# EAGLE board clock sync v1.0 (EAGLE 6.5.0)
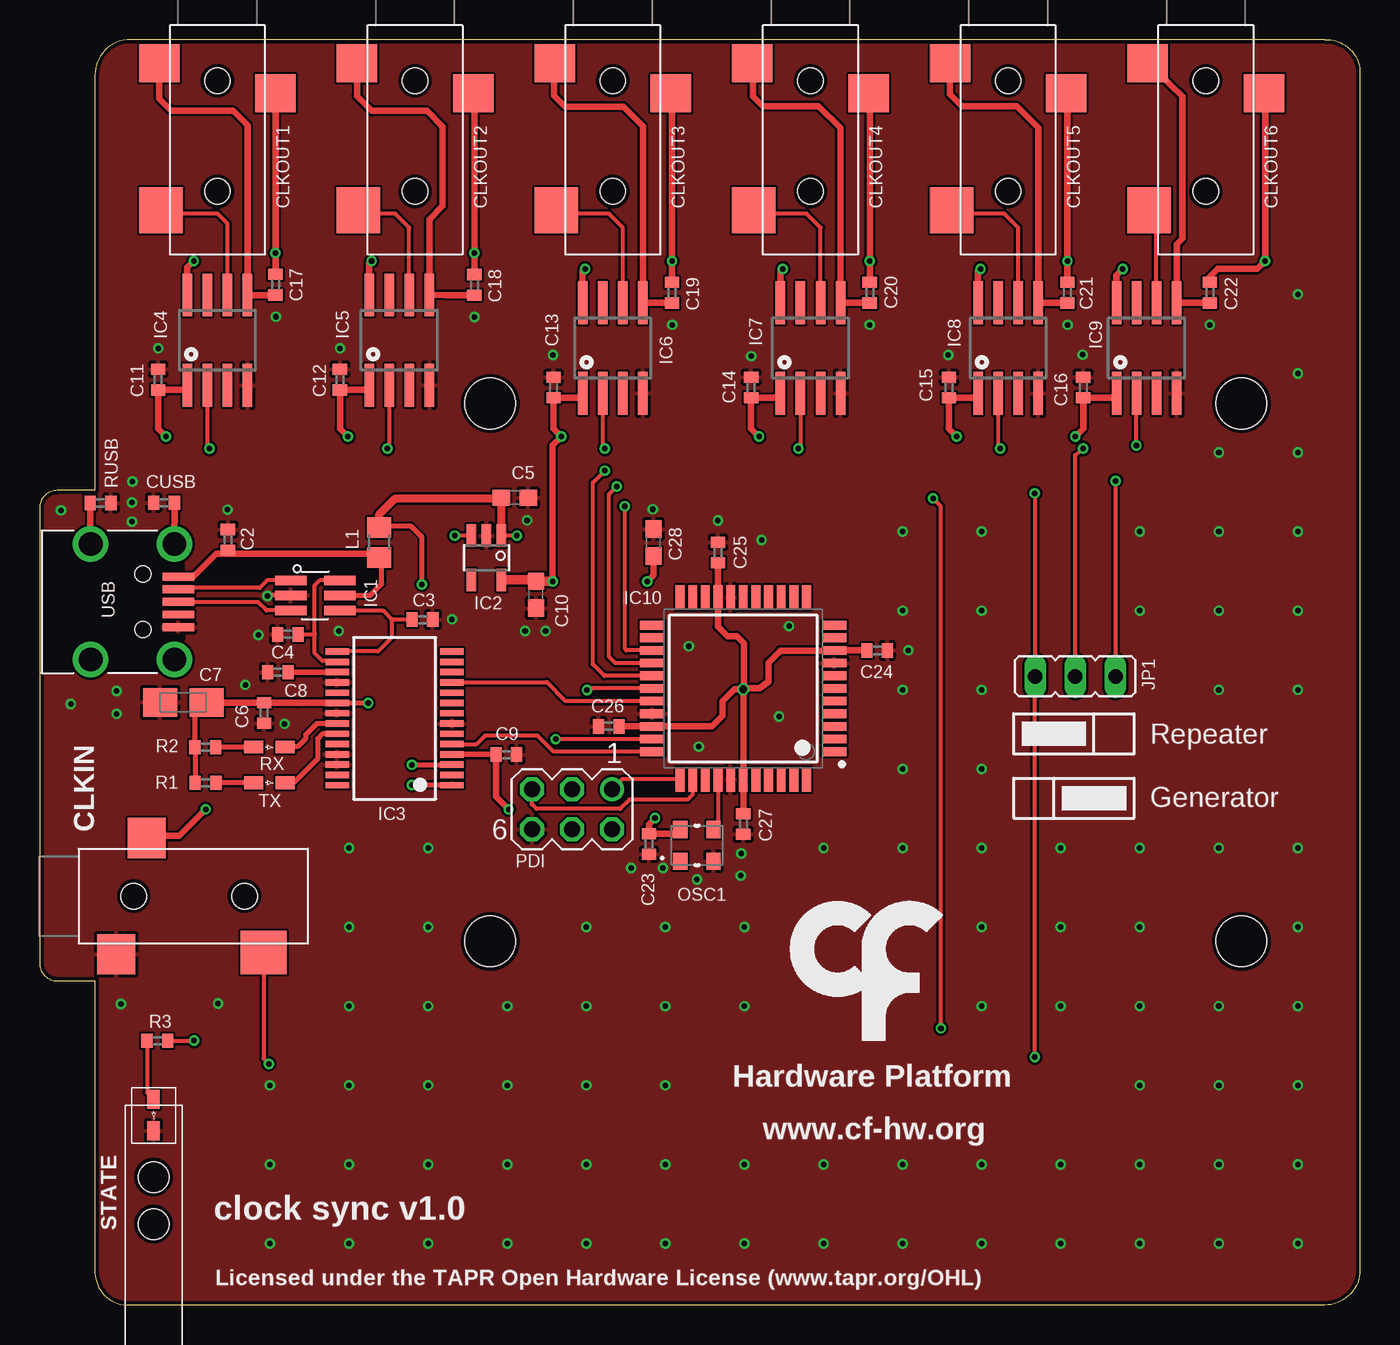
[diagram p0: board, top side]
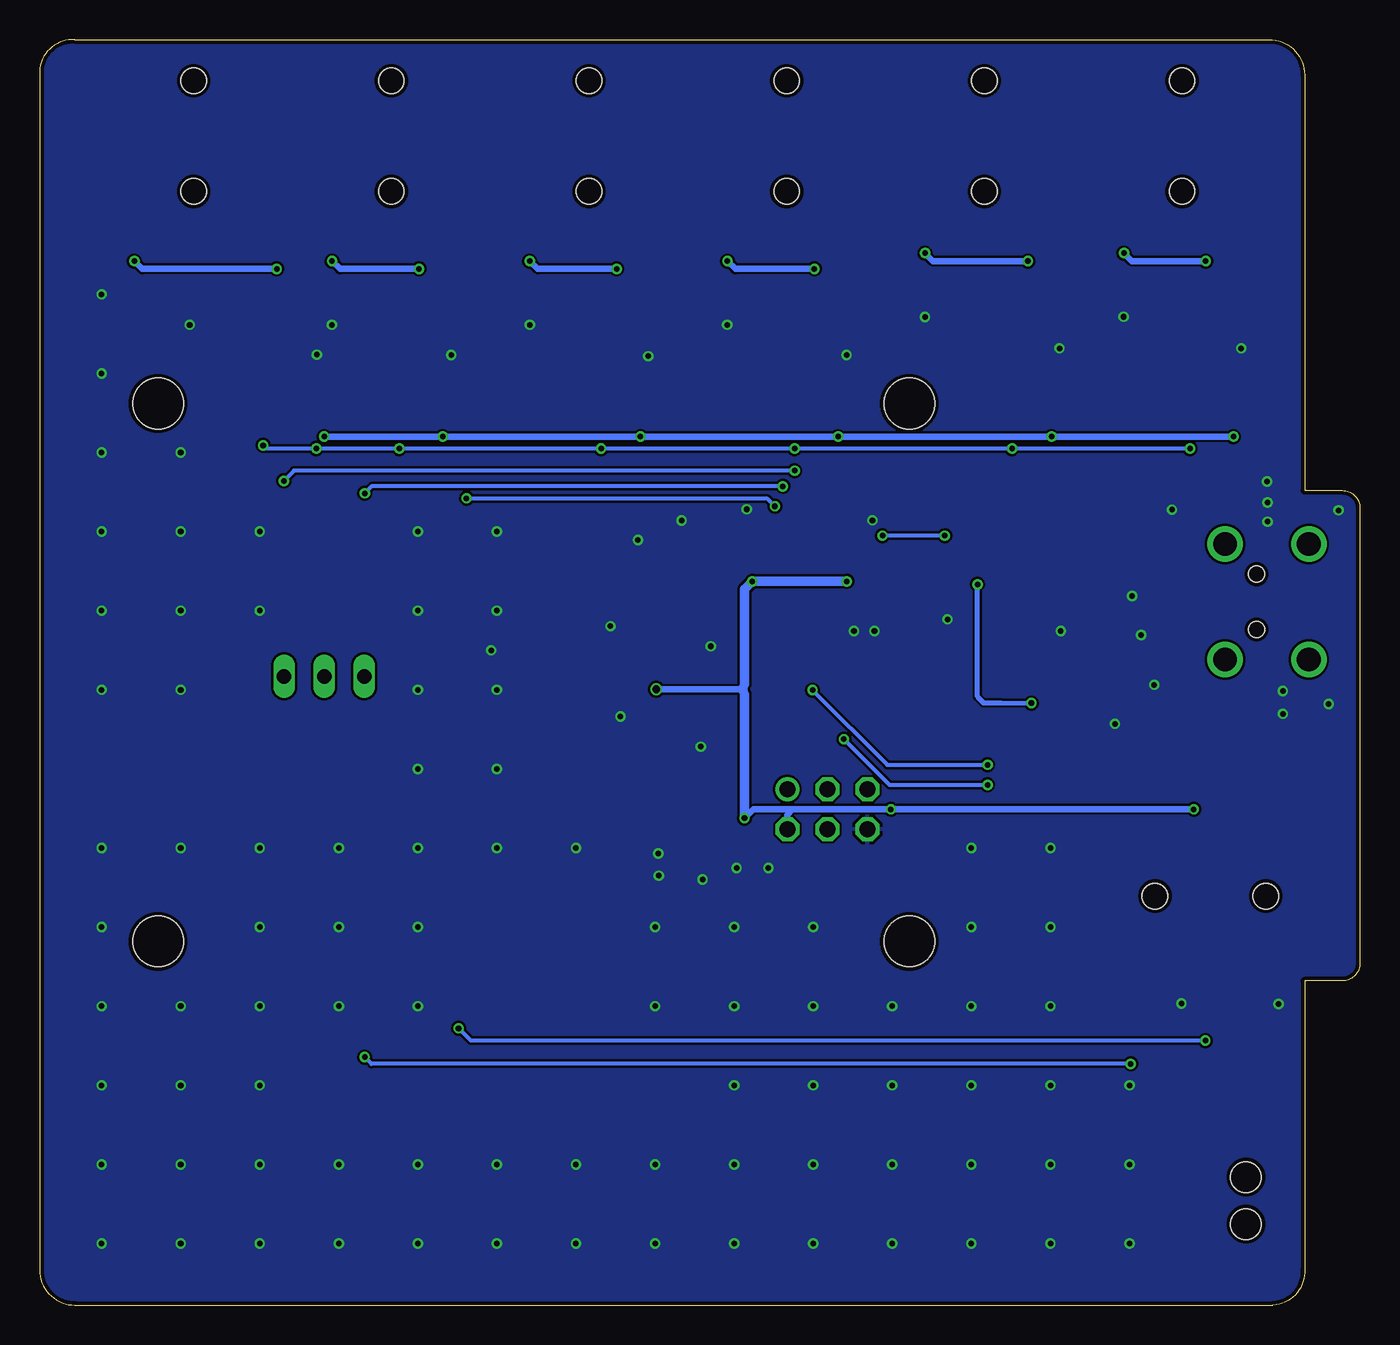
[diagram p1: board, bottom side, seen from below]

Size 83.5 x 80 mm. Coordinates in mm from the lower left corner, seen from the top.
Outline: 3.5,77.76 3.5,51.5 1.12,51.5 arc90 0,50.38 0,21.62 arc90 1.12,20.5 3.5,20.5 3.5,2.24 arc90 5.5,0 81.26,0 arc90 83.5,2.24 83.5,78 arc90 81.26,80 5.74,80 arc90 3.5,77.76
Copper layers (1*16): Top 0.018mm / dielectric 1.55mm / Bottom 0.018mm
Design rules "eC_2Layer_PClass6_BaseCopperO18_eCDefault *": minimum track width 0.15mm, minimum drill 0.35mm, track to track 0.15mm, track to pad 0.15mm, pad to pad 0.15mm, via to via 0.15mm, smd to smd 0mil, copper to edge 0.25mm, drill to drill 0.35mm, minimum pad ring 0.175mm, minimum via ring 0.125mm, stop-mask expansion 0mil, vias tented up to drill 0.45mm, thermal gap 0.2mm
Holes 3.2 mm at 28.5,57 28.5,23 76,57 76,23

## Footprints (pad centres in the part's own frame; a part is rotated, then mirrored left to right if it is on the bottom)
C0402 = smd 0.7 x 0.9: 1 -0.65,0; 2 0.65,0
C0603 = smd 1.1 x 1: 1 -0.85,0; 2 0.85,0
A/3216-18W = smd 2.15 x 1.8: + 1.475,0; - -1.475,0
35RASMT2BHNTRX = smd 2.4 x 2.55: 1 0.8,3.675; 5 -1.1,-3.675 | smd 2.9 x 2.75: 4 8.2,-3.575 | hole 1.6: 0,0; 7,0
SOT23-6L = smd 0.6 x 2: P$1 -0.95,-1.55; P$2 0,-1.55; P$3 0.95,-1.55; P$4 0.95,1.55; P$5 0,1.55; P$6 -0.95,1.55
TSOT23-5 = smd 0.6 x 1.408: 1 -0.95,-1.404; 2 0,-1.404; 3 0.95,-1.404; 4 0.95,1.404; 5 -0.95,1.404
SSOP28 = smd 0.4 x 1.5: 1 -4.225,-3.625; 2 -3.575,-3.625; 3 -2.925,-3.625; 4 -2.275,-3.625; 5 -1.625,-3.625; 6 -0.975,-3.625; 7 -0.325,-3.625; 8 0.325,-3.625; 9 0.975,-3.625; 10 1.625,-3.625; 11 2.275,-3.625; 12 2.925,-3.625; 13 3.575,-3.625; 14 4.225,-3.625; 15 4.225,3.625; 16 3.575,3.625; 17 2.925,3.625; 18 2.275,3.625; 19 1.625,3.625; 20 0.975,3.625; 21 0.325,3.625; 22 -0.325,3.625; 23 -0.975,3.625; 24 -1.625,3.625; 25 -2.275,3.625; 26 -2.925,3.625; 27 -3.575,3.625; 28 -4.225,3.625
SO-08 = smd 0.6 x 2.708: 1 -1.905,-2.854; 2 -0.635,-2.854; 3 0.635,-2.854; 4 1.905,-2.854; 5 1.905,2.854; 6 0.635,2.854; 7 -0.635,2.854; 8 -1.905,2.854
QFP80P1200X1200X120-44N = smd 1.55 x 0.55: 1 -5.75,4; 2 -5.75,3.2; 3 -5.75,2.4; 4 -5.75,1.6; 5 -5.75,0.8; 6 -5.75,0; 7 -5.75,-0.8; 8 -5.75,-1.6; 9 -5.75,-2.4; 10 -5.75,-3.2; 11 -5.75,-4; 23 5.75,-4; 24 5.75,-3.2; 25 5.75,-2.4; 26 5.75,-1.6; 27 5.75,-0.8; 28 5.75,0; 29 5.75,0.8; 30 5.75,1.6; 31 5.75,2.4; 32 5.75,3.2; 33 5.75,4 | smd 0.55 x 1.55: 12 -4,-5.75; 13 -3.2,-5.75; 14 -2.4,-5.75; 15 -1.6,-5.75; 16 -0.8,-5.75; 17 0,-5.75; 18 0.8,-5.75; 19 1.6,-5.75; 20 2.4,-5.75; 21 3.2,-5.75; 22 4,-5.75; 34 4,5.75; 35 3.2,5.75; 36 2.4,5.75; 37 1.6,5.75; 38 0.8,5.75; 39 0,5.75; 40 -0.8,5.75; 41 -1.6,5.75; 42 -2.4,5.75; 43 -3.2,5.75; 44 -4,5.75
JP2_NO_NUMBERS = drill 0.914 long: 1 -2.54,0; 2 0,0; 3 2.54,0
R0805 = smd 1.3 x 1.5: 1 -0.95,0; 2 0.95,0
OSCILLATOR_3.2X2.5 = smd 0.9 x 1.1: P$1 -1.05,-1; P$2 1.05,-1; P$3 1.05,1; P$4 -1.05,1
MA03-2 = drill 1.016: 1 -2.54,-1.27 | drill 1.016 octagon: 2 -2.54,1.27; 3 0,-1.27; 4 0,1.27; 5 2.54,-1.27; 6 2.54,1.27
R0402 = smd 0.7 x 0.9: 1 -0.65,0; 2 0.65,0
LED_HAND = smd 1.2 x 0.8: A -1,0; K 1,0
LED_PIPE_7513D2-L = hole 1.93: -1.486,0; 1.486,0
240-0002-1 = smd 0.5 x 2: P$1 -1.6,8.65; P$2 -0.8,8.65; P$3 0,8.65; P$4 0.8,8.65; P$5 1.6,8.65 | drill 1.5: SHIELD_1 -3.65,3.1; SHIELD_2 3.65,3.1; SHIELD_3 3.65,8.4; SHIELD_4 -3.65,8.4 | hole 1: -1.75,6.4; 1.75,6.4

## Placement (x,y rotation side)
C2  100nF  [C0402]  11.92,48.38 90 top
C3  47pF  [C0402]  24.22,43.34 0 top
C4  47pF  [C0402]  15.71,42.4 180 top
C5  10uF  [C0603]  30.05,51.04 0 top
C6  100nF  [C0402]  14.21,37.43 270 top
C7  4.7uF  [A/3216-18W]  9.09,38.11 0 top
C8  100nF  [C0402]  15.08,40.01 180 top
C9  100nF  [C0402]  29.53,34.8 0 top
C10  10uF  [C0603]  31.39,44.91 270 top
C11  100nF  [C0402]  7.5,58.5 90 top
C12  100nF  [C0402]  19,58.5 90 top
C13  100nF  [C0402]  32.5,58 90 top
C14  100nF  [C0402]  45,58 90 top
C15  100nF  [C0402]  57.5,58 90 top
C16  100nF  [C0402]  66,58 90 top
C17  100nF  [C0402]  14.92,64.5 270 top
C18  100nF  [C0402]  27.5,64.5 270 top
C19  100nF  [C0402]  40,64 270 top
C20  100nF  [C0402]  52.5,64 270 top
C21  100nF  [C0402]  65,64 270 top
C22  100nF  [C0402]  74,64 270 top
C23  100nF  [C0402]  38.54,29.14 270 top
C24  100nF  [C0402]  52.97,41.38 0 top
C25  100nF  [C0402]  42.9,47.57 90 top
C26  100nF  [C0402]  36.01,36.58 180 top
C27  330nF  [C0402]  44.51,30.41 270 top
C28  10uF  [C0603]  38.82,48.2 90 top
CLKIN  [35RASMT2BHNTRX]  5.96,25.86 0 top
CLKOUT1  [35RASMT2BHNTRX]  11.25,77.4 270 top
CLKOUT2  [35RASMT2BHNTRX]  23.75,77.4 270 top
CLKOUT3  [35RASMT2BHNTRX]  36.25,77.4 270 top
CLKOUT4  [35RASMT2BHNTRX]  48.75,77.4 270 top
CLKOUT5  [35RASMT2BHNTRX]  61.25,77.4 270 top
CLKOUT6  [35RASMT2BHNTRX]  73.75,77.4 270 top
CUSB  4.7nF  [C0402]  7.88,50.72 180 top
IC1  USBLC6-2SC6  [SOT23-6L]  17.44,44.86 270 top
IC2  LP5907MFX-3.3  [TSOT23-5]  28.27,47.24 180 top
IC3  FT232RL  [SSOP28]  22.45,37.09 90 top
IC4  SI8610  [SO-08]  11.25,61 0 top
IC5  SI8610  [SO-08]  22.75,61 0 top
IC6  SI8610  [SO-08]  36.25,60.5 0 top
IC7  SI8610  [SO-08]  48.75,60.5 0 top
IC8  SI8610  [SO-08]  61.25,60.5 0 top
IC9  SI8610  [SO-08]  70,60.5 0 top
IC10  ATXMEGAxxxA4U-AU  [QFP80P1200X1200X120-44N]  44.5,38.98 180 top
JP1  [JP2_NO_NUMBERS]  65.5,39.75 0 top
L1  ???  [R0805]  21.48,48.22 270 top
OSC1  [OSCILLATOR_3.2X2.5]  41.57,29.06 0 top
PDI  [MA03-2]  33.68,31.34 180 top
R1  2050 NA  [R0402]  10.5,33.03 180 top
R2  680 NA  [R0402]  10.48,35.27 180 top
R3  68  [R0402]  7.44,16.72 0 top
RUSB  1M  [R0402]  3.87,50.7 0 top
RX  GREEN NA  [LED_HAND]  14.53,35.27 0 top
STATE  GREEN  [LED_HAND]  7.21,12.01 270 top
TX  RED NA  [LED_HAND]  14.53,33.03 0 top
U$1  [LED_PIPE_7513D2-L]  7.21,6.61 90 top
U$9  [LOGO_6]  50.62,22.45 0 top
USB  [240-0002-1]  0.13,44.46 270 top

## Library data of the parts
C2-C28 CUSB L1 R1-R3 RUSB = rcl
CLKIN CLKOUT1-CLKOUT6 USB = CNP-connectors
IC1 = CNP 2
IC2 = CNP
IC3 = ftdichip; MPN: FT232RL; OC_FARNELL: 1146032; OC_NEWARK: 91K9918
IC4-IC9 = CNP-ics 2
IC10 = xmega-a4
JP1 = jumper
OSC1 RX STATE TX U$1 U$9 = CNP-miscellaneous
PDI = con-lstb; OC_FARNELL: unknown; OC_NEWARK: unknown

## Nets
+5V: C5.1 C6.1 C7.+ IC2.1 IC2.3 IC3.20 L1.1 R1.2 R2.2
CLK_IN: CLKIN.4 IC10.26 JP1.1
CLK_SYNC_OUT: IC10.27 JP1.3
CLKOUT: IC4.2 IC5.2 IC6.2 IC7.2 IC8.2 IC9.2 JP1.2
FT_CTS: IC3.11 IC10.29
FT_RTS: IC3.3 IC10.28
FT_RXD: IC3.5 IC10.33
FT_TXD: IC3.1 IC10.32
GND: C2.2 C3.2 C4.2 C5.2 C6.2 C7.- C8.2 C9.2 C10.2 C11.2 C12.2 C13.2 C14.2 C15.2 C16.2 C23.2 C24.2 C25.2 C26.2 C27.2 C28.2 CLKIN.5 CUSB.2 IC1.P$2 IC2.2 IC3.7 IC3.18 IC3.21 IC3.25 IC3.26 IC4.4 IC5.4 IC6.4 IC7.4 IC8.4 IC9.4 IC10.8 IC10.18 IC10.30 IC10.38 OSC1.P$2 PDI.6 RUSB.2 STATE.K USB.P$5
N$1: CLKOUT1.4 IC4.6
N$2: C18.1 CLKOUT2.1 IC5.8
N$3: C18.2 CLKOUT2.5 IC5.5
N$4: CLKOUT2.4 IC5.6
N$5: C19.1 CLKOUT3.1 IC6.8
N$6: C19.2 CLKOUT3.5 IC6.5
N$7: CLKOUT3.4 IC6.6
N$8: C20.1 CLKOUT4.1 IC7.8
N$9: C20.2 CLKOUT4.5 IC7.5
N$10: CLKOUT4.4 IC7.6
N$11: C21.1 CLKOUT5.1 IC8.8
N$12: C21.2 CLKOUT5.5 IC8.5
N$13: C17.1 CLKOUT1.1 IC4.8
N$14: CLKOUT5.4 IC8.6
N$15: C22.1 CLKOUT6.1 IC9.8
N$16: C22.2 CLKOUT6.5 IC9.5
N$18: C17.2 CLKOUT1.5 IC4.5
N$19: CLKOUT6.4 IC9.6
N$23: R3.1 STATE.A
N$38: C8.1 IC3.17
N$39: C2.1 IC1.P$5 L1.2 USB.P$1
N$40: IC1.P$1 USB.P$2
N$47: R2.1 RX.A
N$48: IC3.23 TX.K
N$49: IC3.22 RX.K
N$50: IC1.P$3 USB.P$3
N$59: CUSB.1 USB.SHIELD_4
N$61: RUSB.1 USB.SHIELD_1
N$62: R1.1 TX.A
OSC1: IC10.37 OSC1.P$3
PDI-CLK: IC10.35 PDI.5
PDI-DATA: IC10.34 PDI.1
STATE: IC10.25 R3.2
USBDM: C4.1 IC1.P$6 IC3.16
USBDP: C3.1 IC1.P$4 IC3.15
VCCIO: C9.1 C10.1 C11.1 C12.1 C13.1 C14.1 C15.1 C16.1 C23.1 C24.1 C25.1 C26.1 C27.1 C28.1 CLKIN.1 IC2.5 IC3.4 IC4.1 IC5.1 IC6.1 IC7.1 IC8.1 IC9.1 IC10.9 IC10.19 IC10.31 IC10.39 OSC1.P$4 PDI.2

## Tracks (layer width: path | path; a pad name or v marks a point on that pad's centre or on a via)
+5V  (via drill 0.35 pad 0.65)
  Top 0.254: IC2.3 v26.27,48.65 v26.26,48.64 | v30.2,48.64 29.22,48.64 IC2.1
  Top 0.305: IC2.1 | 16.31,38.06 C6.1 | v20.78,38.05 IC3.20 | R1.2 9.83,33.05 R2.2 9.84,35.29 9.84,37.95 9.7,38.09 10.56,38.09 C7.+ | v24.18,45.56 24.18,48.55 23.51,49.22 21.54,49.22 L1.1
  Top 0.406: IC3.20 16.31,38.06 10.61,38.06 C7.+
  Top 0.508: IC2.1 | IC2.1 29.22,51.02 C5.1 29.16,51 22.5,51 21.49,49.99 L1.1
  Bottom 0.254: v26.26,48.64 v30.2,48.64
  Bottom 0.305: v24.18,45.56 24.18,38.46 23.81,38.07 22.7,38.07 v20.78,38.05
CLK_IN  (via drill 0.35 pad 0.65)
  Top 0.254: IC10.26 36.42,40.58 36,41 36,51.25 v36.5,51.75 | v62.93,51.32 62.93,39.78 JP1.1 62.94,39.73 v62.94,15.68 | CLKIN.4 14.16,15.59 v14.5,15.25
  Bottom 0.254: v36.5,51.75 62.5,51.75 v62.93,51.32 | v14.5,15.25 62.51,15.25 v62.94,15.68
CLK_SYNC_OUT  (via drill 0.35 pad 0.65)
  Top 0.254: IC10.27 35.72,39.78 35,40.5 35,52 v35.75,52.75 | v68.05,52.1 JP1.3
  Bottom 0.254: v35.75,52.75 67.4,52.75 v68.05,52.1
CLKOUT  (via drill 0.35 pad 0.65)
  Top 0.254: IC4.2 10.62,54.28 v10.75,54.15 | v69.36,54.34 IC9.2 | IC8.2 60.62,54.28 v60.75,54.15 | IC7.2 48.12,54.28 v47.99,54.15 | IC6.2 35.62,54.28 v35.75,54.15 | IC5.2 22.11,54.27 v22,54.15 | JP1.2 65.5,53.75 v66,54.15
  Bottom 0.254: v10.75,54.15 v22,54.15 v35.75,54.15 v47.99,54.15 v60.75,54.15 v66,54.15 69.17,54.15 v69.36,54.34
FT_CTS
  Top 0.254: 26.09,39.38 32.08,39.38 33.27,38.18 IC10.29
  Top 0.305: 26.09,39.38 IC3.11
FT_RTS  (via drill 0.35 pad 0.65)
  Top 0.254: IC10.28 34.72,38.98 v34.62,38.88
  Top 0.305: v23.55,34.16 IC3.3
  Bottom 0.254: v34.62,38.88 29.9,34.16 v23.55,34.16
FT_RXD
  Top 0.254: IC3.5 27.63,35.46 28.17,36 31.5,36 32.52,34.98 IC10.33
  Top 0.305: 26.12,35.43 IC3.5
  Top 0.406: 26.09,35.46 IC3.5
FT_TXD  (via drill 0.35 pad 0.65)
  Top 0.254: IC10.32 v32.64,35.78
  Top 0.305: v23.55,32.89 26.06,32.89
  Top 0.406: 26.06,32.89 IC3.1
  Bottom 0.254: v32.64,35.78 29.75,32.89 v23.55,32.89
GND  (via drill 0.35 pad 0.65)
  Top 0.305: IC1.P$2 14.44,44.86 v14.4,44.82
  Top 0.406: IC10.8
  other vias: 18.92,42.62 5.85,50.74 5.85,49.52 5.87,52.06 11.89,50.28 26.09,43.35 13.84,42.36 13.01,39.21 15.5,36.75 4.88,38.83 4.88,37.38 30.7,42.62 32,42.62 46.76,37.2 41.05,41.65 47.4,42.92 41.68,35.3 54.94,41.39 45.66,48.36 42.9,49.6 44.38,28.54 44.35,27.15 5.16,19.04 11.29,19.07 39.42,27.63 30.83,49.61 7.51,60.49 19.01,60.49 45.01,59.99 32.47,60.06 57.47,60.06 65.97,60.08 14.95,62.48 27.5,62.47 40,61.97 52.5,61.97 65,61.97 74,61.97 41.57,26.9 37.41,27.63 38.78,50.31 24.57,8.9 29.57,8.9 19.57,8.9 14.57,8.9 14.57,13.9 19.57,13.9 24.57,13.9 29.57,13.9 34.57,13.9 39.57,13.9 39.57,8.9 34.57,8.9 34.57,3.9 39.57,3.9 44.57,3.9 49.57,3.9 54.57,3.9 59.57,3.9 64.57,3.9 69.57,3.9 74.57,3.9 79.57,3.9 79.57,8.9 79.57,13.9 74.57,13.9 74.57,8.9 69.57,8.9 69.57,13.9 64.57,8.9 59.57,8.9 54.57,8.9 49.57,8.9 44.57,8.9 69.57,18.9 74.57,18.9 79.57,18.9 79.57,23.9 79.57,28.9 74.57,28.9 69.57,28.9 69.57,23.9 79.57,38.9 79.57,43.9 79.57,48.9 79.57,53.9 74.57,53.9 74.57,48.9 74.57,43.9 74.57,38.9 69.57,43.9 69.57,48.9 39.57,18.9 44.57,18.9 34.57,18.9 29.57,18.9 24.57,18.9 19.57,18.9 19.57,23.9 19.57,28.9 24.57,28.9 24.57,23.9 34.57,23.9 39.57,23.9 44.57,23.9 59.57,43.9 59.57,48.9 54.57,48.9 54.57,43.9 59.57,38.9 54.57,38.9 54.57,33.9 54.57,28.9 49.57,28.9 59.57,28.9 59.57,33.9 59.57,23.9 59.57,18.9 64.57,28.9 64.57,23.9 64.57,18.9 79.57,58.9 79.57,63.9 1.35,50.24 1.97,38 29.57,3.9 24.57,3.9 19.57,3.9 14.57,3.9
  pour Bottom: 83.5,0 83.5,80 3.5,80 3.5,51.5 0,51.5 0,20.5 3.5,20.5 3.5,0
  pour Top (rank 2): 83.5,0 83.5,80 3.5,80 3.5,51.5 0,51.5 0,20.5 3.5,20.5 3.5,0
N$1
  Top 0.254: IC4.6 11.88,68.36 11.25,69 7.97,69 CLKOUT1.4
N$2  (via drill 0.35 pad 0.65)
  Top 0.406: IC5.8 20.84,65.84 v21,66 | CLKOUT2.1 27.5,76.62 v27.5,66.5 C18.1
  Bottom 0.406: v21,66 27,66 v27.5,66.5
N$3
  Top 0.406: CLKOUT2.5 20.07,76.42 21,75.5 24.5,75.5 25.5,74.5 25.5,69.5 24.66,68.66 IC5.5 25.66,63.85 C18.2
N$4
  Top 0.254: IC5.6 23.39,68.11 22.5,69 20.48,69 CLKOUT2.4
N$5  (via drill 0.35 pad 0.65)
  Top 0.406: IC6.8 34.34,65.34 v34.5,65.5 | CLKOUT3.1 40,76.62 v40,66 C19.1
  Bottom 0.406: v34.5,65.5 39.5,65.5 v40,66
N$6
  Top 0.406: CLKOUT3.5 32.55,78.58 32.55,76.45 33.23,75.77 36.92,75.77 38.16,74.53 IC6.5 C19.2
N$7
  Top 0.254: IC6.6 36.88,68.11 36,69 32.98,69 CLKOUT3.4
N$8  (via drill 0.35 pad 0.65)
  Top 0.406: IC7.8 46.84,65.34 v47,65.5 | CLKOUT4.1 52.5,76.62 v52.5,66 C20.1
  Bottom 0.406: v47,65.5 52,65.5 v52.5,66
N$9
  Top 0.406: CLKOUT4.5 45.11,78.56 45.11,76.43 45.74,75.8 49.27,75.8 50.66,74.41 IC7.5 C20.2
N$10
  Top 0.254: IC7.6 49.38,68.11 48.5,69 46,69 45.5,68.5 45.5,68.97 CLKOUT4.4
N$11  (via drill 0.35 pad 0.65)
  Top 0.406: IC8.8 59.34,65.34 v59.5,65.5 | CLKOUT5.1 65,76.62 v65,66 C21.1
  Bottom 0.406: v59.5,65.5 64.5,65.5 v65,66
N$12
  Top 0.406: CLKOUT5.5 57.56,78.58 57.56,76.56 58.34,75.77 61.82,75.77 63.16,74.44 IC8.5 C21.2
N$13  (via drill 0.35 pad 0.65)
  Top 0.406: IC4.8 9.34,65.59 v9.75,66 | CLKOUT1.1 14.75,76.88 14.75,77 14.92,76.83 v14.92,66.51 C17.1
  Bottom 0.406: v9.75,66 14.41,66 v14.92,66.51
N$14
  Top 0.254: IC8.6 61.88,68.11 61,69 57.98,69 CLKOUT5.4
N$15  (via drill 0.35 pad 0.65)
  Top 0.406: IC9.8 68.09,65.09 v68.5,65.5 | CLKOUT6.1 77.5,76.62 v77.5,66 77,65.5 74.5,65.5 74,65 C22.1
  Bottom 0.406: v68.5,65.5 77,65.5 v77.5,66
N$16
  Top 0.406: CLKOUT6.5 72.25,76.42 72.25,67.42 71.91,67.07 IC9.5 C22.2
N$18
  Top 0.406: CLKOUT1.5 7.57,78.6 7.57,76.27 8.34,75.5 12.25,75.5 13.15,74.59 IC4.5 C17.2
N$19
  Top 0.254: IC9.6 70.64,68.86 69.5,70 69.5,69.97 CLKOUT6.4
N$23
  Top 0.254: R3.1 6.79,13.43 STATE.A
N$38
  Top 0.305: 16.04,40.01 C8.1
  Top 0.356: IC3.17 16.04,40.01
N$39
  Top 0.305: IC1.P$5 20.92,44.86 21.64,45.59 21.64,46.86 21.01,47.49 21.49,47.49 L1.2 | 9.66,45.99 8.83,46.01 USB.P$1 | C2.1 11.92,47.62
  Top 0.406: 21.01,47.49 11.79,47.49 | 11.79,47.49 11.16,47.49 9.66,45.99 | 11.92,47.62 11.79,47.49
N$40
  Top 0.254: IC1.P$1 14.39,45.81 13.92,45.34 8.87,45.34
  Top 0.305: 8.81,45.28 USB.P$2 8.87,45.34
N$47
  Top 0.305: RX.A R2.1
N$48
  Top 0.305: IC3.23 17.89,36.11 17.58,35.81 17.58,34.54 16.05,33.01 15.54,33.01 TX.K
N$49
  Top 0.305: IC3.22 17.52,36.76 16.82,36.06 16.82,35.81 16.31,35.3 15.55,35.3 RX.K
N$50
  Top 0.254: IC1.P$3 14.35,43.91 13.82,44.44 8.8,44.44
  Top 0.305: 8.81,44.43 USB.P$3 8.8,44.44
N$59
  Top 0.305: 8.51,48.13 USB.SHIELD_4
  Top 0.406: CUSB.1 8.51,48.13
N$61
  Top 0.305: 3.22,48.12 USB.SHIELD_1
  Top 0.406: RUSB.1 3.22,48.12
N$62
  Top 0.305: TX.A R1.1
OSC1
  Top 0.152: 42.9,30.34 OSC1.P$3
  Top 0.254: IC10.37 42.9,30.34
PDI-CLK
  Top 0.254: IC10.35 41.3,32.27 40.99,31.95 37.31,31.95 36.72,31.37 31.41,31.37 31.14,31.65 PDI.5
PDI-DATA
  Top 0.254: IC10.34 36.83,33.23 PDI.1
STATE  (via drill 0.35 pad 0.65)
  Top 0.254: IC10.25 37.12,41.38 37,41.5 v37,50.5 | R3.2 v9.77,16.72 v9.78,16.72 | v57,17.5 57,50.5 v56.5,51
  Bottom 0.254: v9.78,16.72 56.22,16.72 v57,17.5 | v56.5,51 37.5,51 v37,50.5
USBDM
  Top 0.254: IC1.P$6 17.71,45.81 17.4,45.5 17.4,42.41 | 18.77,40.72 17.88,40.72 17.4,41.2 17.4,42.41 | C4.1 17.39,42.4 17.4,42.41
  Top 0.305: 18.77,40.72 IC3.16
USBDP
  Top 0.254: IC1.P$4 21.72,43.91 22.28,43.35 | 22.28,43.33 22.28,42.2 21.4,41.32 IC3.15 | C3.1 22.29,43.34
  Top 0.305: IC3.15 | 22.28,43.35 22.28,43.33 22.29,43.34
VCCIO  (via drill 0.35 pad 0.65, 0.5 pad 0.65)
  Top 0.305: 31.31,45.84 C10.1 | C27.1
  Top 0.356: IC3.4 28.87,34.81
  Top 0.406: C24.1 IC10.9 | IC10.9 | C25.1 42.9,46.05 IC10.19 42.9,42.88 43.49,42.29 44.1,42.29 44.56,41.83 44.56,39.09 44.41,38.93 | C26.1 IC10.31 42.51,36.58 43.19,37.26 43.19,38.17 43.95,38.93 44.41,38.93 | 28.87,34.81 C9.1 28.88,32.13 v29.66,31.34 | 44.41,38.93 44.5,38.99 | 44.5,38.99 v44.5,38.93 IC10.39 C27.1 | IC10.9 46.85,41.37 46.08,40.61 46.08,39.39 45.53,38.99 44.5,38.99 | OSC1.P$4 40.52,29.79 C23.1 38.54,30.4 v38.92,30.79 | CLKIN.1 6.76,29.67 8.83,29.67 v10.51,31.34 | C28.1 38.82,46.14 v38.42,45.74 | IC4.1 9.05,57.85 C11.1 7.5,55.4 v8,54.9 | IC5.1 20.55,57.85 C12.1 19,55.4 v19.5,54.9 | IC6.1 34.05,57.35 C13.1 32.5,55.4 v33,54.9 32.44,54.34 32.44,45.76 | IC7.1 46.55,57.35 C14.1 45,55.4 v45.5,54.9 | v58,54.9 57.5,55.4 C15.1 59.05,57.35 IC8.1 | v65.5,54.9 66,55.4 C16.1 67.8,57.35 IC9.1
  Top 0.61: IC2.5 31.31,45.84 | C10.1 32.44,45.76 v32.46,45.74
  Bottom 0.406: v44.5,38.93 39.23,38.93 | 39.23,38.93 38.92,38.63 38.92,39.24 39.23,38.93 | 35.88,31.34 v29.66,31.34 v10.51,31.34 | 35.88,31.34 38.36,31.34 v38.92,30.79 | PDI.2 36.22,31.01 35.88,31.34 | v8,54.9 v19.5,54.9 v33,54.9 v45.5,54.9 v58,54.9 v65.5,54.9
  Bottom 0.61: 38.92,38.63 v38.92,30.79 | v32.46,45.74 v38.42,45.74 38.92,45.25 38.92,39.24

## Text on the board
tPlace: Repeater | Generator | Hardware Platform | www.cf-hw.org | clock sync v1.0 | Licensed under the TAPR Open Hardware License (www.tapr.org/OHL) | Licensed under the TAPR Open / Hardware License (www.tapr.org/OHL) / / Copyright 2017 Artur Silva and Filipe Carvalho